# Altium PCB EE579_Skittles_pcb.PcbDoc
Units mm, origin at the board's own origin, x right, y up, seen from the top; angles counter-clockwise.
Board outline 58 x 50 mm, 2 copper layers (Top Layer, Bottom Layer); 20 components, 22 nets, 78 pads, 0 vias.
Unrouted connection lines stored in the file: 32.
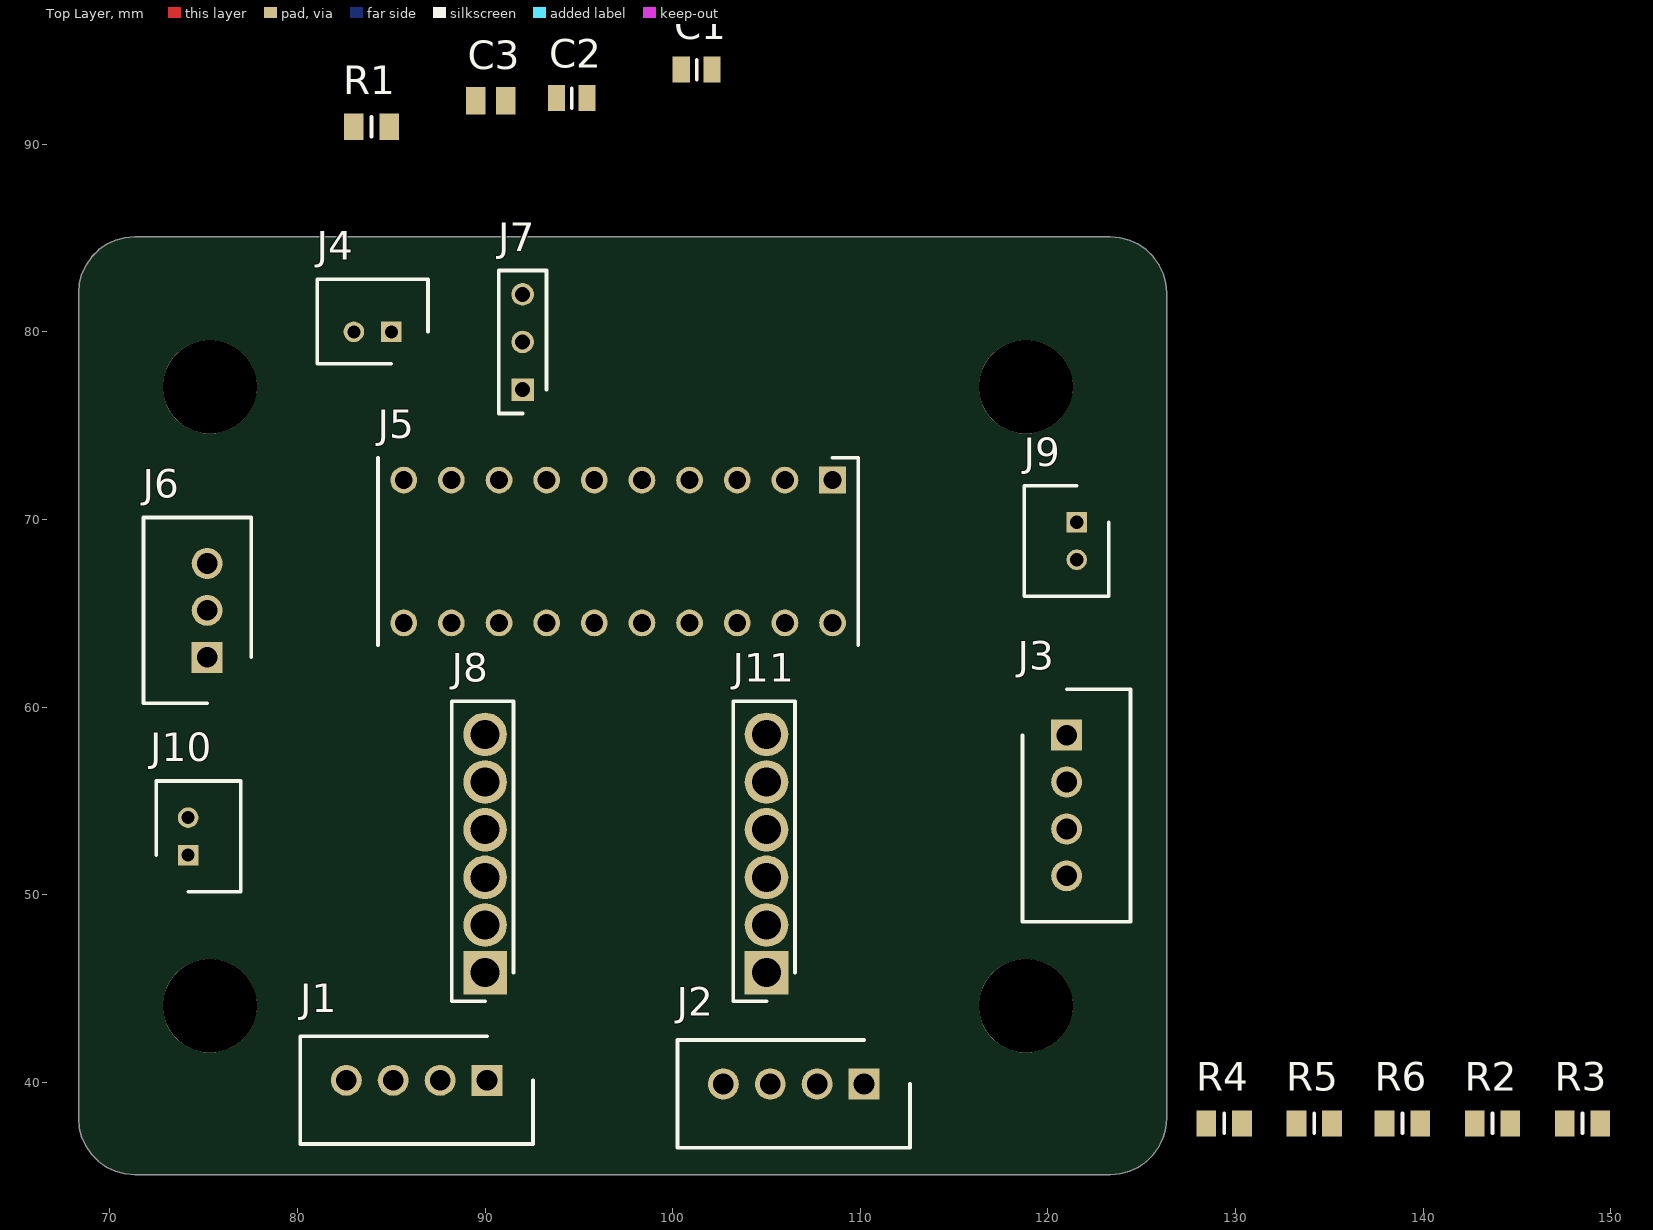
[diagram p0: Top Layer view]
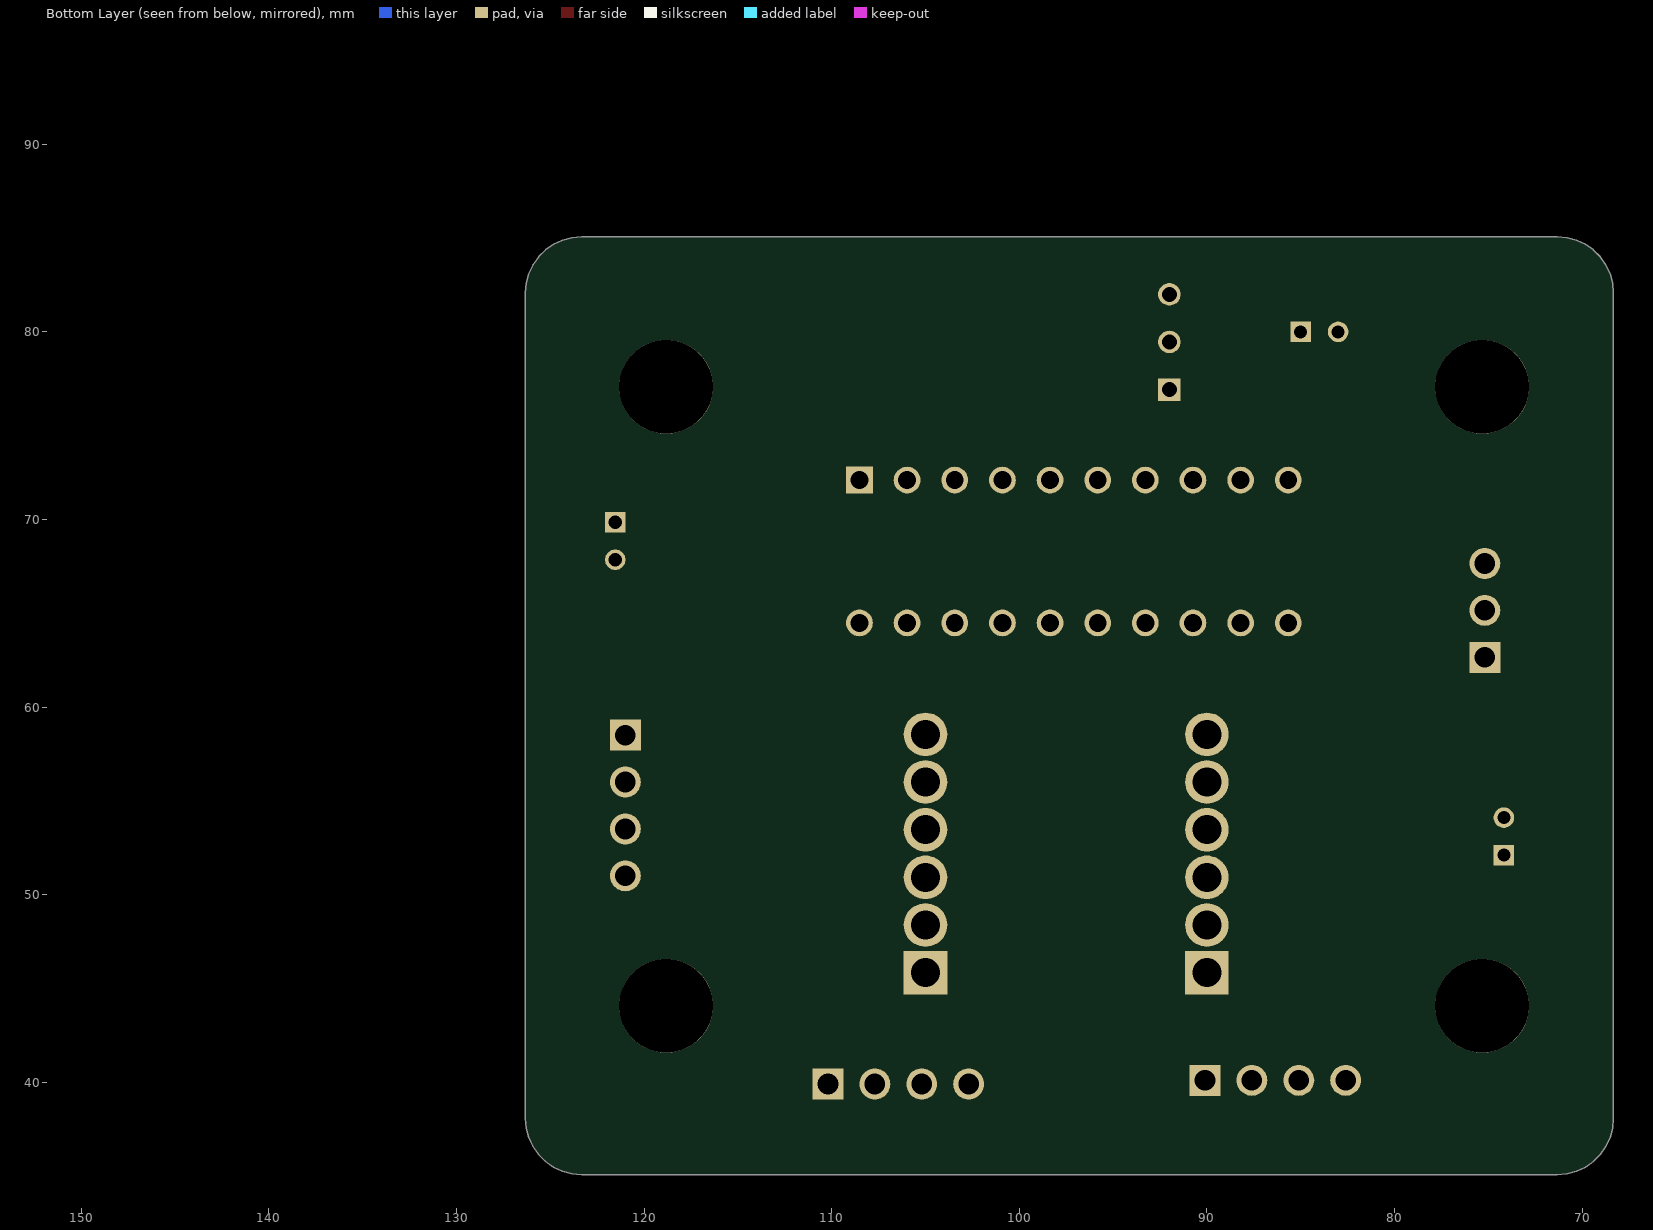
[diagram p1: Bottom Layer view, seen from below]

## Layer stack, top to bottom
Top Solder: solder mask 0.0102, Solder Resist, Dk 3.5
Top Layer: signal copper 0.0356
Dielectric 1: dielectric 0.32, FR-4, Dk 4.8
Bottom Layer: signal copper 0.0356
Bottom Solder: solder mask 0.0102, Solder Resist, Dk 3.5

## Board outline
123.326,35.071 123.847,35.117 124.352,35.252 124.826,35.473 125.254,35.773 125.624,36.143 125.924,36.571 126.145,37.045 126.28,37.55 126.326,38.071 126.326,82.071 126.28,82.592 126.145,83.097 125.924,83.571 125.624,83.999 125.254,84.369 124.826,84.669 124.352,84.89 123.847,85.025 123.326,85.071 71.326,85.071 70.805,85.025 70.3,84.89 69.826,84.669 69.398,84.369 69.028,83.999 68.728,83.571 68.507,83.097 68.372,82.592 68.326,82.071 68.326,38.071 68.372,37.55 68.507,37.045 68.728,36.571 69.028,36.143 69.398,35.773 69.826,35.473 70.3,35.252 70.805,35.117 71.326,35.071

## Design rules (kind name [scope] priority, off if disabled: settings)
Clearance [All] p1: gap=0.254 ignorepadtopadclearanceinfootprint=FALSE
PolygonConnect [All] p1: connectstyle=Relief reliefconductorwidth=0.254 reliefentries=4 polygonreliefangle="90 Angle" airgapwidth=0.254
RoutingVias [All] p1: holewidth=0.711 width=1.27 viastyle="Through Hole" minholewidth=0.711 minwidth=1.27 maxholewidth=0.711 maxwidth=1.27
SolderMaskExpansion [All] p1: expansion=0.102 istentingtop=FALSE
Width [All] p1: maxlimit=0.254 minlimit=0.254 preferedwidth=0.254
30 further rules are at their usual default settings.

## Components (designator, comment, footprint, x,y, rotation, side; value= is the part's Value field where it differs from the comment)
C1 "21A106KQFNNNG" CAPC2012X135N 101.277,93.98 r0 top
C2 "CL21B105KPFNNNE" CAPC2012X135N 94.615,92.456 r0 top
C3 "CC0805KPX7R9BB104" CAPC2012X95N 90.297,92.329 r0 top
J1 "Ultra_A" SHDR4W64P0X250_1X4_1240X575X700P 90.1,40.1 r180 top
J2 "Ultra_B" SHDR4W64P0X250_1X4_1240X575X700P 110.2,39.9 r180 top
J3 "Ultra_C" SHDR4W64P0X250_1X4_1240X575X700P 121,58.5 r270 top
J4 "B2B-PH-K-S_LF__SN_" SHDR2W50P0X200_1X2_590X450X600P 85,80 r0 top
J5 "MSP430G2553 IC Socket" DIPS762W70P254L2540H510Q20N 108.52,72.1 r270 top
J6 "B3B-XH-A__LF__SN_" SHDR3W64P0X250_1X3_990X575X700P 75.184,62.651 r90 top
J7 "801-87-003-10-001101" RHDR3W60P0X254_1X3_762X254X700P 92,76.92 r90 top
J8 "61300611821" RHDR6W97P0X254_1X6_1574X250X865P 90,45.84 r90 top
J9 "Drive Motor" SHDR2W50P0X200_1X2_590X450X600P 121.539,69.85 r90 top
J10 "Steer Motor" SHDR2W50P0X200_1X2_590X450X600P 74.168,52.102 r270 top
J11 "61300611821" RHDR6W97P0X254_1X6_1574X250X865P 105,45.84 r90 top
R1 "ERJ-PB6B3002V" RESC2012X70N 83.947,90.932 r0 top
R2 "ERJ-PB6B3002V" RESC2012X70N 143.7,37.8 r0 top
R3 "ERJ-PB6B3002V" RESC2012X70N 148.5,37.8 r0 top
R4 "ERJ-PB6B3002V" RESC2012X70N 129.4,37.8 r0 top
R5 "ERJ-PB6B3002V" RESC2012X70N 134.2,37.8 r0 top
R6 "ERJ-PB6B3002V" RESC2012X70N 138.9,37.8 r0 top

## Footprints (in the part's own frame and the unit in brackets; to place one, negate y for a bottom-side part, rotate by r counter-clockwise, add the part's x,y. Pads: shape width x height; smd on the part's side, far side on the other; paste and mask are expansions set on the pad)
CAPC2012X95N [mm]
  rect 1.02x1.47 smd: 1(-0.8,0) 2(0.8,0)
  body extent -1,-0.63 1,0.63, height 0.95
CAPC2012X135N [mm]
  rect 0.91x1.39 smd: 1(-0.82,0) 2(0.82,0)
  silkscreen extent 0,-0.53 0,0.53, body extent -1,-0.63 1,0.63, height 1.35
DIPS762W70P254L2540H510Q20N [mm]
  rect 1.425x1.425 hole 0.95: 1(0,0)
  round 1.425 hole 0.95: 2(0,-2.54) 3(0,-5.08) 4(0,-7.62) 5(0,-10.16) 6(0,-12.7) 7(0,-15.24) 8(0,-17.78) 9(0,-20.32) 10(0,-22.86) 11(7.62,-22.86) 12(7.62,-20.32) 13(7.62,-17.78) 14(7.62,-15.24) 15(7.62,-12.7) 16(7.62,-10.16) 17(7.62,-7.62) 18(7.62,-5.08) 19(7.62,-2.54) 20(7.62,0)
  silkscreen extent -1.19,-24.23 8.81,1.37, body extent -1.19,-24.13 8.81,1.27, height 5
RESC2012X70N [mm]
  rect 1.05x1.4 smd: 1(-0.95,0) 2(0.95,0)
  silkscreen extent 0,-0.53 0,0.53, body extent -1,-0.63 1,0.63, height 0.7
RHDR3W60P0X254_1X3_762X254X700P [mm]
  rect 1.2x1.2 hole 0.8: 1(0,0)
  round 1.2 hole 0.8: 2(2.54,0) 3(5.08,0)
  silkscreen extent -1.27,-1.27 6.35,1.27, body extent -1.27,-1.27 6.35,1.27, height 7
RHDR6W97P0X254_1X6_1574X250X865P [mm]
  rect 2.325x2.325 hole 1.55: 1(0,0)
  round 2.325 hole 1.55: 2(2.54,0) 3(5.08,0) 4(7.62,0) 5(10.16,0) 6(12.7,0)
  silkscreen extent -1.52,-1.51 14.47,1.78, body extent -1.52,-1.25 14.22,1.25, height 8.65
SHDR2W50P0X200_1X2_590X450X600P [mm]
  rect 1.1x1.1 hole 0.7: 1(0,0)
  round 1.1 hole 0.7: 2(-2,0)
  silkscreen extent -3.95,-1.7 1.95,2.8, body extent -3.95,-2.25 1.95,2.25, height 6
SHDR3W64P0X250_1X3_990X575X700P [mm]
  rect 1.65x1.65 hole 1.1: 1(0,0)
  round 1.65 hole 1.1: 2(2.5,0) 3(5,0)
  silkscreen extent -2.45,-2.35 7.45,3.4, body extent -2.45,-2.88 7.45,2.88, height 7
SHDR4W64P0X250_1X4_1240X575X700P [mm]
  rect 1.65x1.65 hole 1.1: 1(0,0)
  round 1.65 hole 1.1: 2(2.5,0) 3(5,0) 4(7.5,0)
  silkscreen extent -2.45,-2.35 9.95,3.4, body extent -2.45,-2.88 9.95,2.88, height 7

## Part data
C1: library part CL21A106KQFNNNG, "Capacitor", Manufacturer_Name=SAMSUNG, Mouser Part Number=187-CL21A106KQFNNNG, Arrow Part Number=CL21A106KQFNNNG, Arrow Price/Stock=https://www.arrow.com/en/products/cl21a106kqfnnng/samsung-electro-mechanics?region=nac, Datasheet Link=https://octopart.com/cl21a106kpfnnne-samsung-9301557?gclid=EAIaIQobChMIppmoo53d5wIV14XVCh0LRA8uEAAYAiAAEgJJyPD_BwE, Height=1.35mm, Manufacturer_Part_Number=CL21A106KQFNNNG, Mouser Price/Stock=https://www.mouser.co.uk/ProductDetail/Samsung-Electro-Mechanics/CL21A106KQFNNNG?qs=hqM3L16%252Bxle4yU%252BqidqWig%3D%3D
C2: "Capacitor", Manufacturer_Name=SAMSUNG, Mouser Part Number=187-CL21B105KPFNNNE, Arrow Part Number=CL21B105KPFNNNE, Arrow Price/Stock=https://www.arrow.com/en/products/cl21b105kpfnnne/samsung-electro-mechanics?region=nac, Datasheet Link=https://datasheet.datasheetarchive.com/originals/distributors/Datasheets_SAMA/2d87a2a5c85914a1c305fff6363ab8b8.pdf, Height=1.35mm, Manufacturer_Part_Number=CL21B105KPFNNNE, Mouser Price/Stock=https://www.mouser.co.uk/ProductDetail/Samsung-Electro-Mechanics/CL21B105KPFNNNE?qs=349EhDEZ59rb3V94UrmRdQ%3D%3D
C3: "Capacitor", Manufacturer_Name=YAGEO, Mouser Part Number=603-CC805KPX7R9BB104, Datasheet Link=https://www.yageo.com/upload/media/product/productsearch/datasheet/mlcc/UPY-GPHC_X7R_6.3V-to-250V_22.pdf, Height=0.95mm, Manufacturer_Part_Number=CC0805KPX7R9BB104, Mouser Price/Stock=https://www.mouser.co.uk/ProductDetail/YAGEO/CC0805KPX7R9BB104?qs=vTakOoo5QyLPWGiom%252Bf2Ug%3D%3D
J1 J2 J3: library part B4B-XH-A__LF__SN_, "Connector", Arrow Part Number="B4B-XH-A (LF)(SN)", Manufacturer_Name="JST (JAPAN SOLDERLESS TERMINALS)", Arrow Price/Stock=https://www.arrow.com/en/products/b4b-xh-a-lf-sn/jst-manufacturing?region=europe, Datasheet Link="https://componentsearchengine.com/Datasheets/2/B4B-XH-A (LF)(SN).pdf", Height=7mm, Manufacturer_Part_Number="B4B-XH-A (LF)(SN)"
J4: "Connector", Arrow Part Number=B2B-PH-K-S(LF)(SN), Manufacturer_Name="JST (JAPAN SOLDERLESS TERMINALS)", Arrow Price/Stock=https://www.arrow.com/en/products/b2b-ph-k-s-lf-sn/jst-manufacturing?region=europe, Datasheet Link=https://datasheet.lcsc.com/szlcsc/JST-Sales-America-B2B-PH-K-S-LF-SN_C131337.pdf, Height=6mm, Manufacturer_Part_Number=B2B-PH-K-S(LF)(SN)
J5: library part 1-2199298-6, "Connector", Manufacturer_Name="TE Connectivity", Mouser Part Number=571-1-2199298-6, Arrow Part Number=1-2199298-6, Arrow Price/Stock=https://www.arrow.com/en/products/1-2199298-6/te-connectivity?region=europe, Datasheet Link=https://www.te.com/commerce/DocumentDelivery/DDEController?Action=showdoc&DocId=Customer+Drawing%7F2199298%7FA%7Fpdf%7FEnglish%7FENG_CD_2199298_A_baseFilename.pdf%7F1-2199298-6, Height=5.1mm, Manufacturer_Part_Number=1-2199298-6, Mouser Price/Stock=https://www.mouser.co.uk/ProductDetail/TE-Connectivity/1-2199298-6?qs=fK8dlpkaUMvuMXpJTs4GlA%3D%3D
J6: "Connector", Manufacturer_Name="JST (JAPAN SOLDERLESS TERMINALS)", Manufacturer_Part_Number="B3B-XH-A (LF)(SN)", Datasheet Link=http://www.jst-mfg.com/product/pdf/eng/eXH.pdf, Height=7mm
J7: "Connector", Manufacturer_Name=Preci-Dip, Mouser Part Number=437-8018700310001101, Arrow Part Number=801-87-003-10-001101, Arrow Price/Stock=https://www.arrow.com/en/products/801-87-003-10-001101/preci-dip-sa, Datasheet Link=http://www.precidip.com/en/Products/PCB-Connectors/pview/801-PP-NNN-10-001101.html, Height=7mm, Manufacturer_Part_Number=801-87-003-10-001101, Mouser Price/Stock=https://www.mouser.co.uk/ProductDetail/Preci-dip/801-87-003-10-001101?qs=FtMuP6KVi2T66jAxB5rZkg%3D%3D
J8 J11: "Connector", Manufacturer_Name="Wurth Elektronik", Mouser Part Number=710-61300611821, Datasheet Link=https://www.we-online.de/katalog/datasheet/61300611821.pdf, Height=8.65mm, Manufacturer_Part_Number=61300611821, Mouser Price/Stock=https://www.mouser.co.uk/ProductDetail/Wurth-Elektronik/61300611821?qs=iLbezkQI%252BsgS21jF2eozhA%3D%3D
J9 J10: library part B2B-PH-K-S_LF__SN_, "Connector", Arrow Part Number=B2B-PH-K-S(LF)(SN), Manufacturer_Name="JST (JAPAN SOLDERLESS TERMINALS)", Arrow Price/Stock=https://www.arrow.com/en/products/b2b-ph-k-s-lf-sn/jst-manufacturing?region=europe, Datasheet Link=https://datasheet.lcsc.com/szlcsc/JST-Sales-America-B2B-PH-K-S-LF-SN_C131337.pdf, Height=6mm, Manufacturer_Part_Number=B2B-PH-K-S(LF)(SN)
R1 R2 R3 R4 R5 R6: "Resistor", Manufacturer_Name=Panasonic, Mouser Part Number=667-ERJ-PB6B3002V, Arrow Part Number=ERJ-PB6B3002V, Arrow Price/Stock=https://www.arrow.com/en/products/erj-pb6b3002v/panasonic?region=nac, Datasheet Link=https://componentsearchengine.com/Datasheets/1/ERJ-PB6B3002V.pdf, Height=0.7mm, Manufacturer_Part_Number=ERJ-PB6B3002V, Mouser Price/Stock=https://www.mouser.co.uk/ProductDetail/Panasonic/ERJ-PB6B3002V?qs=eFOtW6xYNWHxFAxx7HWdpg%3D%3D

## Free pads (board coordinates)
  round 5 hole 5: 1(75.326,77.071) 1(75.326,44.071) 1(118.826,44.071) 1(118.826,77.071)

## Nets (pads, with @x,y where several pads share a name; then routed paths per layer and width w, separated by ;. In a path a pad name is that pad's centre, name@x,y a point inside that pad or via, vN(x,y) a via of type N, cw(c..) or ccw(c..) an arc to the next point about the centre after c; other vN are vias at no path point)
+3.3: C1.2 C2.2 C3.2 J5.1 J6.1 J7.2
+5: J1.1 J2.1 J3.1
DriveMotor_A: J11.6
DriveMotor_B: J11.5
GND: C1.1 C2.1 C3.1 J1.4 J2.4 J3.4 J4.2 J5.20 J6.2 J7.3 J11.3 R4.1 R5.1 R6.1
IR_out: J6.3
NetJ1_3: J1.3 R1.2
NetJ2_3: J2.3 R2.2
NetJ3_3: J3.3 R3.2
NetJ8_2: J8.2 J9.1
NetJ8_3: J8.3 J9.2
NetJ8_4: J8.4 J10.1
NetJ8_5: J8.5 J10.2
SteerMotor_A: J11.2
SteerMotor_B: J11.1
UltraEchoA: R1.1 R4.2
UltraEchoB: R2.1 R5.2
UltraEchoC: R3.1 R6.2
UltraTrigA: J1.2
UltraTrigB: J2.2
UltraTrigC: J3.2
VCC: J4.1 J7.1 J11.4
pads on no net: J5.2 J5.3 J5.4 J5.5 J5.6 J5.7 J5.8 J5.9 J5.10 J5.11 J5.12 J5.13 J5.14 J5.15 J5.16 J5.17 J5.18 J5.19 J8.1 J8.6

## Silkscreen, mask and mechanical layers (free items; w line width, h text height)
Mechanical 1:
  the board outline again, w0

## Dimensions
90,58.54 to 105,58.54 on Mechanical 1